# EAGLE board HC_SR04_Multiplex_Shield (EAGLE 6.0)
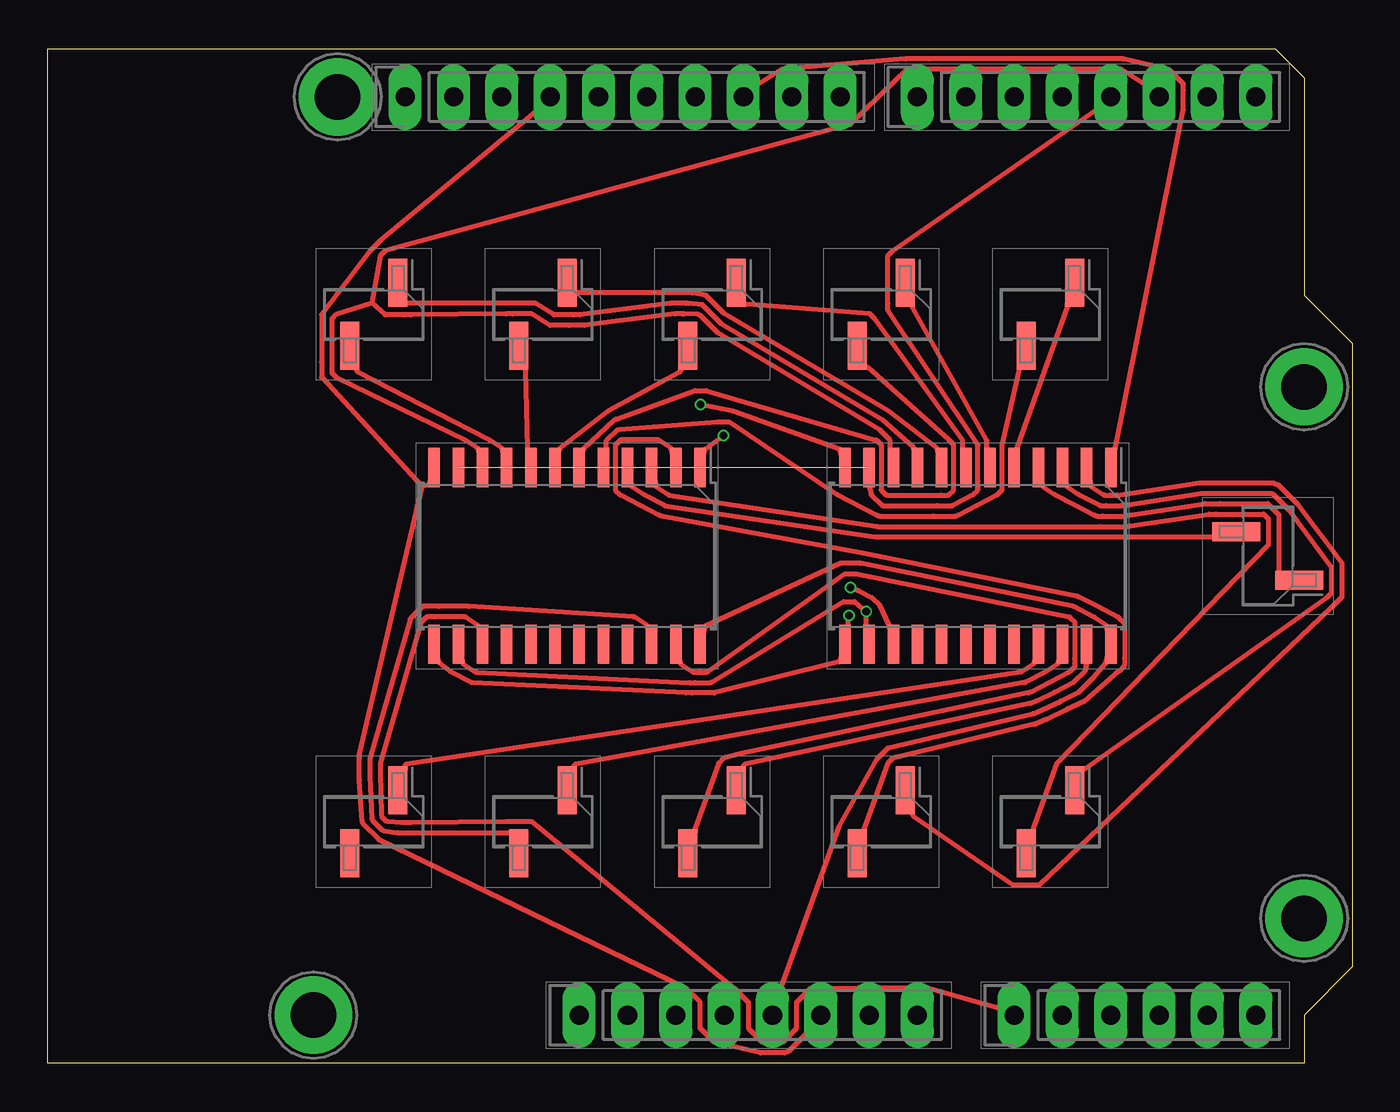
[diagram p0: board, top side]
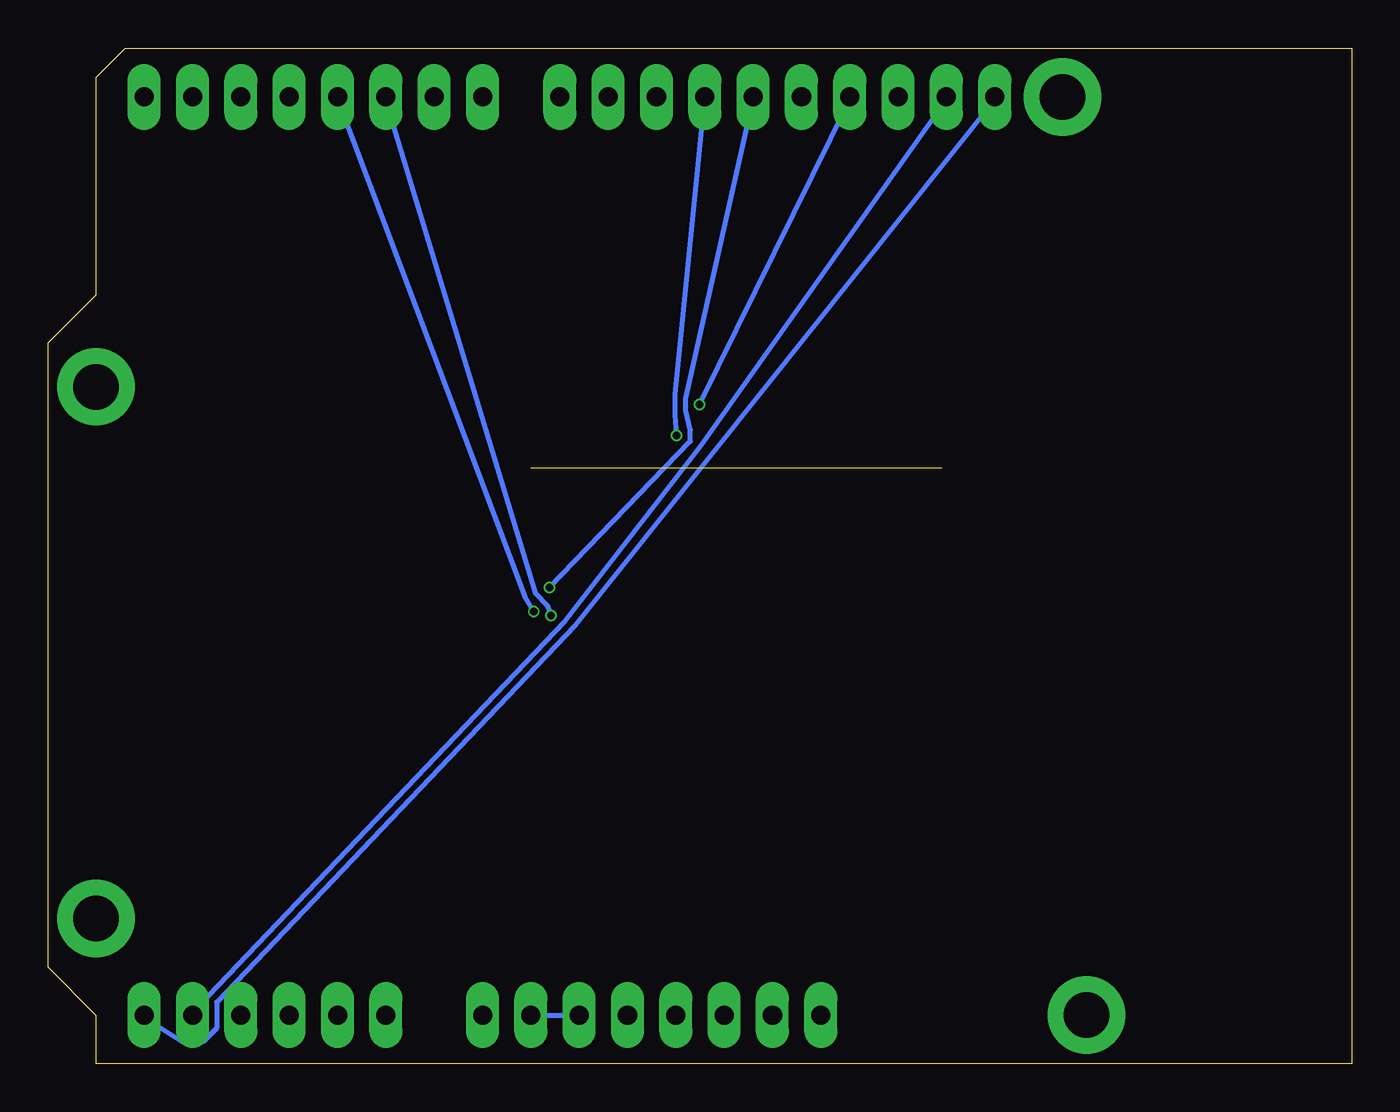
[diagram p1: board, bottom side, seen from below]

Size 68.58 x 53.34 mm. Coordinates in mm from the lower left corner, seen from the top.
Outline: 66.04,51.82 66.04,40.39 68.58,37.85 68.58,5.08 66.04,2.54 66.04,0 0,0 0,53.34 64.52,53.34 66.04,51.82
Copper layers 1+16: F.Cu 0.0035mm / dielectric 0.15mm / B.Cu 0.0035mm
Design rules: minimum track width 0.25mm, track to track 0.05mm, copper to edge 0.3mm, minimum pad ring 0.1mm, minimum via ring 0.1mm
Net classes: 0 kicad_default: width 0.25 mm, clearance 0.3 mm

## Footprints (pad centres in the part's own frame; a part is rotated, then mirrored left to right if it is on the bottom)
Connector_PinHeader_2.54mm:PinHeader_1x02_P2.54mm_Vertical_SMD_Pin1Left = smd 2.51 x 1: 1 -1.655,1.27; 2 1.655,-1.27
Connector_PinHeader_2.54mm:PinHeader_1x02_P2.54mm_Vertical_SMD_Pin1Left::1 = smd 2.51 x 1: 1 -1.655,1.27; 2 1.655,-1.27
Socket_Arduino_Uno:Socket_Strip_Arduino_1x08 = drill 1 pad 1.727 long: 1 0,0; 2 2.54,0; 3 5.08,0; 4 7.62,0; 5 10.16,0; 6 12.7,0; 7 15.24,0; 8 17.78,0
Socket_Arduino_Uno:Socket_Strip_Arduino_1x06 = drill 1 pad 1.727 long: 1 0,0; 2 2.54,0; 3 5.08,0; 4 7.62,0; 5 10.16,0; 6 12.7,0
Socket_Arduino_Uno:Socket_Strip_Arduino_1x10 = drill 1 pad 1.727 long: 1 0,0; 2 2.54,0; 3 5.08,0; 4 7.62,0; 5 10.16,0; 6 12.7,0; 7 15.24,0; 8 17.78,0; 9 20.32,0; 10 22.86,0
Socket_Arduino_Uno:Arduino_1pin = drill 2.4 pad 4.064: 1 0,0
Package_SO:SOIC-24W_7.5x15.4mm_P1.27mm = smd 2.051 x 0.601: 1 -4.65,6.985; 2 -4.65,5.715; 3 -4.65,4.445; 4 -4.65,3.175; 5 -4.65,1.905; 6 -4.65,0.635; 7 -4.65,-0.635; 8 -4.65,-1.905; 9 -4.65,-3.175; 10 -4.65,-4.445; 11 -4.65,-5.715; 12 -4.65,-6.985; 13 4.65,-6.985; 14 4.65,-5.715; 15 4.65,-4.445; 16 4.65,-3.175; 17 4.65,-1.905; 18 4.65,-0.635; 19 4.65,0.635; 20 4.65,1.905; 21 4.65,3.175; 22 4.65,4.445; 23 4.65,5.715; 24 4.65,6.985
Package_SO:SOIC-24W_7.5x15.4mm_P1.27mm::1 = smd 2.051 x 0.601: 1 -4.65,6.985; 2 -4.65,5.715; 3 -4.65,4.445; 4 -4.65,3.175; 5 -4.65,1.905; 6 -4.65,0.635; 7 -4.65,-0.635; 8 -4.65,-1.905; 9 -4.65,-3.175; 10 -4.65,-4.445; 11 -4.65,-5.715; 12 -4.65,-6.985; 13 4.65,-6.985; 14 4.65,-5.715; 15 4.65,-4.445; 16 4.65,-3.175; 17 4.65,-1.905; 18 4.65,-0.635; 19 4.65,0.635; 20 4.65,1.905; 21 4.65,3.175; 22 4.65,4.445; 23 4.65,5.715; 24 4.65,6.985

## Placement (x,y rotation side)
J1  [Connector_PinHeader_2.54mm:PinHeader_1x02_P2.54mm_Vertical_SMD_Pin1Left]  17.14,39.37 270 top
J2  [Connector_PinHeader_2.54mm:PinHeader_1x02_P2.54mm_Vertical_SMD_Pin1Left::1]  26.03,39.37 270 top
J3  [Connector_PinHeader_2.54mm:PinHeader_1x02_P2.54mm_Vertical_SMD_Pin1Left]  34.92,39.37 270 top
J4  [Connector_PinHeader_2.54mm:PinHeader_1x02_P2.54mm_Vertical_SMD_Pin1Left::1]  43.81,39.37 270 top
J5  [Connector_PinHeader_2.54mm:PinHeader_1x02_P2.54mm_Vertical_SMD_Pin1Left]  52.7,39.37 270 top
J6  [Connector_PinHeader_2.54mm:PinHeader_1x02_P2.54mm_Vertical_SMD_Pin1Left::1]  64.14,26.67 180 top
J7  [Connector_PinHeader_2.54mm:PinHeader_1x02_P2.54mm_Vertical_SMD_Pin1Left]  52.7,12.7 270 top
J8  [Connector_PinHeader_2.54mm:PinHeader_1x02_P2.54mm_Vertical_SMD_Pin1Left::1]  43.81,12.7 270 top
J9  [Connector_PinHeader_2.54mm:PinHeader_1x02_P2.54mm_Vertical_SMD_Pin1Left]  34.92,12.7 270 top
J10  [Connector_PinHeader_2.54mm:PinHeader_1x02_P2.54mm_Vertical_SMD_Pin1Left::1]  26.03,12.7 270 top
J11  [Connector_PinHeader_2.54mm:PinHeader_1x02_P2.54mm_Vertical_SMD_Pin1Left]  17.14,12.7 270 top
P1  [Socket_Arduino_Uno:Socket_Strip_Arduino_1x08]  27.94,2.54 0 top
P2  [Socket_Arduino_Uno:Socket_Strip_Arduino_1x06]  50.8,2.54 0 top
P3  [Socket_Arduino_Uno:Socket_Strip_Arduino_1x10]  18.8,50.8 0 top
P4  [Socket_Arduino_Uno:Socket_Strip_Arduino_1x08]  45.72,50.8 0 top
P5  [Socket_Arduino_Uno:Arduino_1pin]  13.97,2.54 0 top
P6  [Socket_Arduino_Uno:Arduino_1pin]  66.04,7.62 0 top
P7  [Socket_Arduino_Uno:Arduino_1pin]  15.24,50.8 0 top
P8  [Socket_Arduino_Uno:Arduino_1pin]  66.04,35.56 0 top
U1  [Package_SO:SOIC-24W_7.5x15.4mm_P1.27mm]  48.89,26.67 270 top
U2  [Package_SO:SOIC-24W_7.5x15.4mm_P1.27mm::1]  27.3,26.67 270 top

## Library data of the parts
J1-J11 P1-P8 U1 U2 = TopoR

## Nets
+3V3: P1.4
+5V: P1.5 U1.24 U2.24
/0(Rx): P4.8
/1(Tx): P4.7
/2: P4.6 U1.10 U2.10
/3: P4.5 U1.11 U2.11
/4: P4.4 U1.14 U2.14
/5: P4.3 U1.13 U2.13
/6(**): P4.2
/7: P4.1
/8: P3.10
/9(**): P3.9
/10(ECHO): P3.8 U1.1
/11(TRIG): P3.7 U2.1
/12: P3.6 U1.15
/13(SCK): P3.5
/A0: P2.1 U2.15
/A1: P2.2
/A2: P2.3
/A3: P2.4
/A4(SDA): P2.5 P3.2
/A5(SCL): P2.6 P3.1
/AREF: P3.3
/E1: J1.1 U1.9
/E2: J2.1 U1.8
/E3: J3.1 U1.7
/E4: J4.1 U1.6
/E5: J5.1 U1.5
/E6: J6.1 U1.4
/E7: J7.1 U1.3
/E8: J8.1 U1.2
/E9: J9.1 U1.23
/E10: J10.1 U1.22
/E11: J11.1 U1.21
/IOREF: P1.2
/Reset: P1.3
/T1: J1.2 U2.9
/T2: J2.2 U2.8
/T3: J3.2 U2.7
/T4: J4.2 U2.6
/T5: J5.2 U2.5
/T6: J6.2 U2.4
/T7: J7.2 U2.3
/T8: J8.2 U2.2
/T9: J9.2 U2.23
/T10: J10.2 U2.22
/T11: U2.21
/T12: J11.2
/Vin: P1.8
GND: P1.6 P1.7 P3.4 U1.12 U2.12
Net-(P1-Pad1): P1.1
Net-(P5-Pad1): P5.1
Net-(P6-Pad1): P6.1
Net-(P7-Pad1): P7.1
Net-(P8-Pad1): P8.1
Net-(U1-Pad16): U1.16
Net-(U1-Pad17): U1.17
Net-(U1-Pad18): U1.18
Net-(U1-Pad19): U1.19
Net-(U1-Pad20): U1.20
Net-(U2-Pad16): U2.16
Net-(U2-Pad17): U2.17
Net-(U2-Pad18): U2.18
Net-(U2-Pad19): U2.19
Net-(U2-Pad20): U2.20

## Tracks (layer width: path | path; a pad name or v marks a point on that pad's centre or on a via)
+5V
  F.Cu 0.25: P1.5 38.1,2.69 41.62,12.48 43.61,16.01 44.18,16.58 51.77,18.37 51.78,18.38 51.8,18.38 52.27,18.58 53.24,19.05 54.2,19.51 55.02,20.33 55.62,21.03 55.62,21.04 U1.24 55.64,23.02 55.01,23.45 53.93,24.02 53.92,24.02 42.73,26.28 41.68,26.28 34.56,22.98 U2.24
/2
  F.Cu 0.25: U1.10 44.29,32.34 44.29,32.74 43.73,33.3 35.22,38.4 35.15,38.47 34.3,39.32 34.19,39.36 33.46,39.39 33.33,39.39 32.98,39.39 28.21,38.8 27.4,38.8 26.4,38.8 25.44,39.39 24.44,39.39 24.09,39.39 19.09,39.34 18.74,39.34 17.74,39.34 17.03,39.98 | U2.10 22.62,32.32 21.99,32.75 15.2,36.03 14.95,36.28 14.95,36.64 14.95,39.15 15.2,39.39 17.03,39.98 | P4.6 58.42,50.95 56.42,52.24 56.41,52.24 46.25,52.24 45.19,52.24 45.18,52.24 42.19,49.36 17.74,42.7 17.49,42.46 17.03,39.98
/3  (1 unrouted)
  F.Cu 0.25: U1.11 43.2,30.42 43.2,30.29 43.2,30.24 43.29,29.9 43.86,29.32 43.87,29.32 43.9,29.32 46.74,29.32 47.54,29.32 47.57,29.32 47.58,29.32 48.64,29.88 48.89,30.13 48.89,30.16 48.89,30.31 48.89,30.58 48.89,32.51 44.16,39.59 44.16,39.95 44.16,42.46 44.41,42.7 55.88,50.65 P4.5
/4  (via drill 0.4 pad 0.6)
  F.Cu 0.25: U1.14 43.02,23.05 v43.03,23.75 42.42,24.27 41.82,24.27 34.92,20.04 34.89,20.03 34.87,20.02 34.84,20.02 34.04,20.02 33.74,20.02 22.53,20.57 22.51,20.57 22.48,20.58 22.46,20.59 21.83,21.02 U2.14
  B.Cu 0.25: P4.4 53.34,50.65 43.48,24.48 v43.03,23.75
/5  (via drill 0.4 pad 0.6)
  F.Cu 0.25: U2.13 20.59,21.06 21.17,20.6 21.19,20.59 22.27,20.02 22.28,20.02 22.31,20.02 33.56,19.47 33.86,19.47 35.02,19.47 35.05,19.47 41.61,21.11 U1.13 42.07,23.05 v42.12,23.55
  B.Cu 0.25: v42.12,23.55 42.3,24.05 42.93,24.7 50.8,50.65 P4.3
/10(ECHO)
  F.Cu 0.25: U1.1 56.12,32.32 59.69,50.12 59.69,51.17 59.69,51.48 58.95,52.22 56.52,52.79 46.36,52.79 45.08,52.79 38.58,52.24 36.58,50.95 P3.8
/11(TRIG)  (via drill 0.4 pad 0.6)
  F.Cu 0.25: U2.1 34.56,32.28 v35.52,32.99
  B.Cu 0.25: v35.52,32.99 35.6,34.1 35.6,35.16 34.04,50.65 P3.7
/12  (via drill 0.4 pad 0.6)
  F.Cu 0.25: U1.15 44.24,23.03 43.75,24.05 43.33,24.48 42.65,24.82 v42.2,25
  B.Cu 0.25: v42.2,25 34.79,32.69 34.79,33.29 35.05,34.33 35.05,34.93 31.5,50.65 P3.6
/A0
  F.Cu 0.25: U2.15 22.62,23.02 21.99,23.45 21.98,23.46 21.97,23.46 21.94,23.47 21.93,23.47 21.92,23.47 20.35,23.47 19.99,23.47 19.98,23.47 19.97,23.47 19.94,23.46 19.93,23.46 19.92,23.45 19.91,23.44 19.9,23.43 19.89,23.43 19.64,23.18 19.63,23.17 19.62,23.16 19.61,23.15 19.61,23.13 19.6,23.12 17.49,15.79 17.49,15.66 17.49,15.31 17.54,13.07 17.56,12.95 17.77,12.75 17.88,12.72 18.61,12.67 18.74,12.67 19.09,12.67 24.09,12.72 24.44,12.72 25.44,12.72 36.09,3.96 36.83,3.22 36.83,1.86 37.57,1.12 38.63,1.12 39.37,1.86 39.37,3.22 40.11,3.96 42.65,3.98 43.71,3.98 46.25,3.98 50.8,2.69 P2.1
/A4(SDA)
  B.Cu 0.25: P3.2 21.34,50.65 34.24,32.46 41.4,23.24 60.17,3.54 60.96,2.69 P2.5
/A5(SCL)
  B.Cu 0.25: P3.1 18.8,50.65 40.85,23.02 59.69,3.22 59.69,1.86 60.43,1.12 61.49,1.12 63.5,2.39 P2.6
/E1
  F.Cu 0.25: U1.9 45.53,32.34 45.52,32.35 43.87,33.83 35.44,38.85 34.41,39.88 33.68,39.94 33.56,39.94 32.75,39.94 27.98,39.34 27.63,39.34 26.63,39.34 25.67,39.94 18.92,39.94 18.79,39.94 J1.1
/E2
  F.Cu 0.25: U1.8 46.75,32.32 44.19,34.29 35.55,39.42 34.7,40.27 34.63,40.34 34.58,40.36 33.86,40.49 27.8,40.49 27.68,40.49 J2.1
/E3
  F.Cu 0.25: U1.7 48.1,32.34 48.1,32.74 43.47,39.15 43.22,39.39 36.75,39.89 36.7,39.89 36.57,39.89 J3.1
/E4
  F.Cu 0.25: U1.6 49.37,32.34 49.37,32.74 45.46,39.72 45.46,39.77 45.46,39.89 J4.1
/E5
  F.Cu 0.25: U1.5 50.96,32.34 50.96,32.35 53.6,39.72 53.6,39.77 53.6,39.89 J5.1
/E6
  F.Cu 0.25: U1.4 52.31,30.32 52.94,29.89 54.02,29.32 55.02,28.81 55.11,28.77 55.12,28.77 55.15,28.77 55.45,28.77 56.61,28.77 56.64,28.77 60.82,29.41 61.63,29.41 64.14,29.41 64.71,28.84 64.71,25.9 64.71,25.77 J6.1
/E7
  F.Cu 0.25: U1.3 53.58,30.32 54.21,29.89 55.29,29.32 55.3,29.32 55.33,29.32 55.63,29.32 56.43,29.32 56.46,29.32 60.65,29.96 61.8,29.96 64.31,29.96 64.41,29.93 65.22,29.11 67.47,26.08 67.47,25.08 67.47,24.72 67.22,24.47 54.53,15.48 54.48,15.48 54.35,15.48 J7.1
/E8
  F.Cu 0.25: U1.2 54.85,30.32 55.48,29.89 55.5,29.88 55.53,29.87 55.55,29.87 55.85,29.87 56.21,29.87 56.23,29.87 60.54,30.52 61.91,30.52 64.42,30.52 64.72,30.39 65.69,29.42 68.02,26.3 68.02,25.3 68.02,24.5 67.45,23.92 52.11,9.36 51.76,9.36 50.76,9.36 45.53,12.97 45.46,13.05 45.46,13.1 45.46,13.22 J8.1
/E9
  F.Cu 0.25: U1.23 54.58,21.12 54.58,20.99 54.58,20.94 54.5,20.6 53.93,20.02 52.93,19.51 51.97,19.05 51.68,18.92 51.66,18.92 36.64,15.73 36.57,15.66 36.57,15.61 36.57,15.48 J9.1
/E10
  F.Cu 0.25: U1.22 53.1,21.02 53.09,21.01 52.47,20.59 51.39,20.02 51.38,20.02 27.75,15.73 27.68,15.66 27.68,15.61 27.68,15.48 J10.1
/E11
  F.Cu 0.25: U1.21 51.83,21.02 51.83,21.01 51.2,20.59 51.18,20.58 51.15,20.57 18.86,15.73 18.79,15.66 18.79,15.61 18.79,15.48 J11.1
/T1
  F.Cu 0.25: U2.9 23.89,32.32 23.26,32.75 22.18,33.31 16.32,36.33 16.25,36.41 16.25,36.46 16.25,36.58 J1.2
/T2
  F.Cu 0.25: U2.8 25.24,32.34 25.14,36.46 25.14,36.58 J2.2
/T3
  F.Cu 0.25: U2.7 26.91,32.32 29.47,34.29 33.21,36.33 33.28,36.41 33.28,36.46 33.28,36.58 J3.2
/T4
  F.Cu 0.25: U2.6 28.18,32.32 29.79,33.83 29.88,33.87 34.02,35.35 34.62,35.35 43.56,32.76 43.57,32.75 43.81,32.51 43.81,30.13 44.06,29.89 44.07,29.88 44.1,29.87 44.12,29.87 46.96,29.87 47.32,29.87 47.34,29.87 47.37,29.88 47.62,30.13 47.62,30.16 47.62,30.31 47.62,30.58 47.62,32.51 47.38,32.75 43.1,36.58 43.05,36.58 42.92,36.58 J4.2
/T5
  F.Cu 0.25: U2.5 29.37,32.34 29.37,32.74 29.93,33.3 30.05,33.32 35.21,33.72 35.81,33.72 41.51,29.89 43.59,28.81 43.68,28.77 43.7,28.77 43.72,28.77 46.56,28.77 47.72,28.77 47.74,28.77 47.76,28.77 47.85,28.81 48.85,29.32 49.91,29.88 50.16,30.13 50.17,30.16 50.17,32.49 51.06,36.41 51.06,36.46 51.06,36.58 J5.2
/T6
  F.Cu 0.25: U2.4 30.72,30.32 31.35,29.89 32.43,29.32 32.44,29.32 43.48,27.67 43.51,27.67 61.23,27.67 61.35,27.67 J6.2
/T7
  F.Cu 0.25: U2.3 31.99,30.32 32.62,29.89 32.64,29.88 32.67,29.87 43.58,28.22 43.61,28.22 55.34,28.22 56.72,28.22 56.74,28.22 61.05,28.86 61.4,28.86 63.91,28.86 64.16,28.62 64.16,27.62 64.16,27.26 53.05,15.79 51.81,12.35 51.81,12.3 51.81,12.17 J7.2
/T8
  F.Cu 0.25: U2.2 32.78,32.32 32.15,32.75 32.14,32.76 32.13,32.76 32.1,32.77 32.09,32.77 32.08,32.77 30.51,32.77 30.15,32.77 30.14,32.77 30.13,32.77 30.1,32.76 29.85,32.51 29.84,32.49 29.84,30.58 29.84,30.31 29.84,30.13 30.09,29.89 30.1,29.88 31.16,29.32 32.16,28.81 32.25,28.77 32.27,28.77 42.84,26.83 54.09,24.57 54.11,24.56 54.2,24.53 55.2,24.02 56.28,23.45 56.29,23.44 56.3,23.43 56.55,23.19 56.57,23.17 56.58,23.15 56.6,23.12 56.6,23.1 56.61,23.07 56.61,21.32 56.61,20.97 56.6,20.94 56.6,20.92 56.58,20.89 56.57,20.87 56.32,20.62 56.3,20.6 54.51,19.05 53.54,18.58 52.52,18.08 51.97,17.85 51.96,17.85 51.84,17.82 44.41,16.03 44.16,15.79 42.92,12.35 42.92,12.3 42.92,12.17 J8.2
/T9
  F.Cu 0.25: U2.23 33.26,21.02 33.89,20.59 33.91,20.58 33.94,20.57 33.96,20.57 34.26,20.57 34.62,20.57 34.64,20.57 34.67,20.58 34.69,20.59 34.71,20.6 41.9,25.73 42.5,25.73 53.69,23.47 53.72,23.46 53.73,23.45 53.98,23.21 53.98,21.28 53.98,21.01 53.98,20.86 53.97,20.83 53.72,20.58 52.66,20.02 51.66,19.51 51.57,19.47 51.55,19.47 36.42,16.29 35.52,16.03 35.27,15.79 34.03,12.35 34.03,12.3 34.03,12.17 J9.2
/T10
  F.Cu 0.25: U2.22 31.51,23.02 30.88,23.45 30.87,23.46 30.86,23.46 30.83,23.47 30.82,23.47 30.81,23.47 22.14,24.02 20.57,24.02 19.77,24.02 19.75,24.02 19.74,24.02 19.71,24.01 19.7,24.01 19.69,24 19.68,23.99 19.67,23.99 19.66,23.98 19.09,23.41 19.08,23.4 19.07,23.38 19.06,23.37 19.06,23.36 19.05,23.35 16.94,16.01 16.94,15.89 16.94,15.08 17.04,12.86 17.09,12.76 17.57,12.27 17.68,12.22 18.39,12.12 24.27,12.12 24.39,12.12 J10.2
GND  (via drill 0.4 pad 0.6)
  F.Cu 0.25: U2.12 20.02,30.41 19.7,30.32 | P1.6 40.64,2.39 39.85,1.54 38.95,0.63 38.74,0.55 37.46,0.55 35.03,1.12 34.29,1.86 34.29,3.22 33.55,3.96 17.45,11.73 17.37,11.8 16.62,12.55 16.56,12.64 16.55,12.68 16.39,14.91 16.39,16.06 16.39,16.19 19.7,30.32 | P3.4 26.42,50.65 17.51,43.25 16.94,42.68 14.4,39.37 14.4,36.86 14.4,36.06 19.7,30.32 | U1.12 41.64,32.28 36.04,34.27 v34.32,34.63
  B.Cu 0.25: v34.32,34.63 26.42,50.65 P3.4 | P1.7 P1.6